# EAGLE board LilyPad_LED_5pcs_Panel_v10 (EAGLE 7.5.0), part 1 of 2
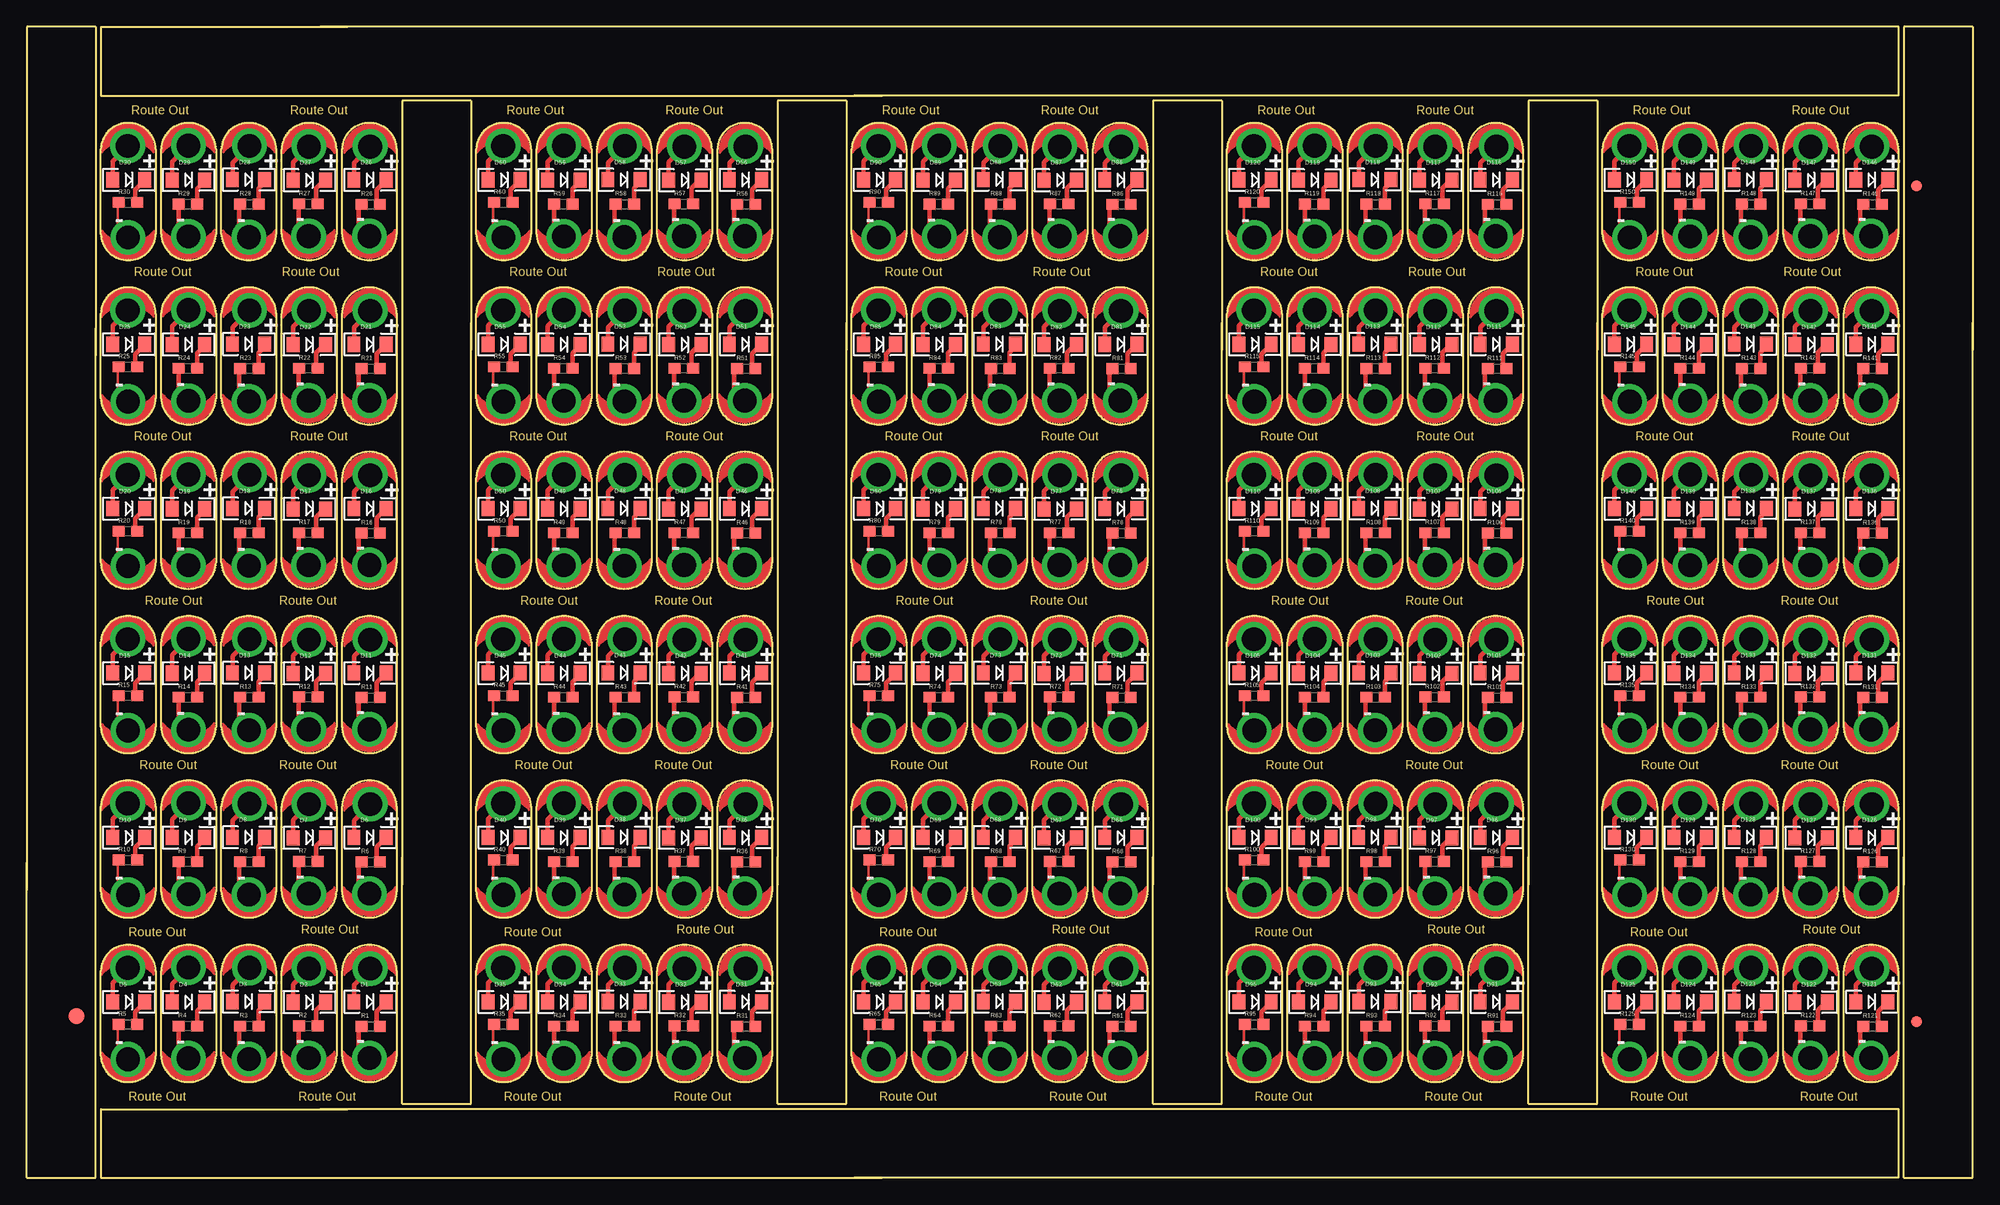
[diagram p0: board, top side]
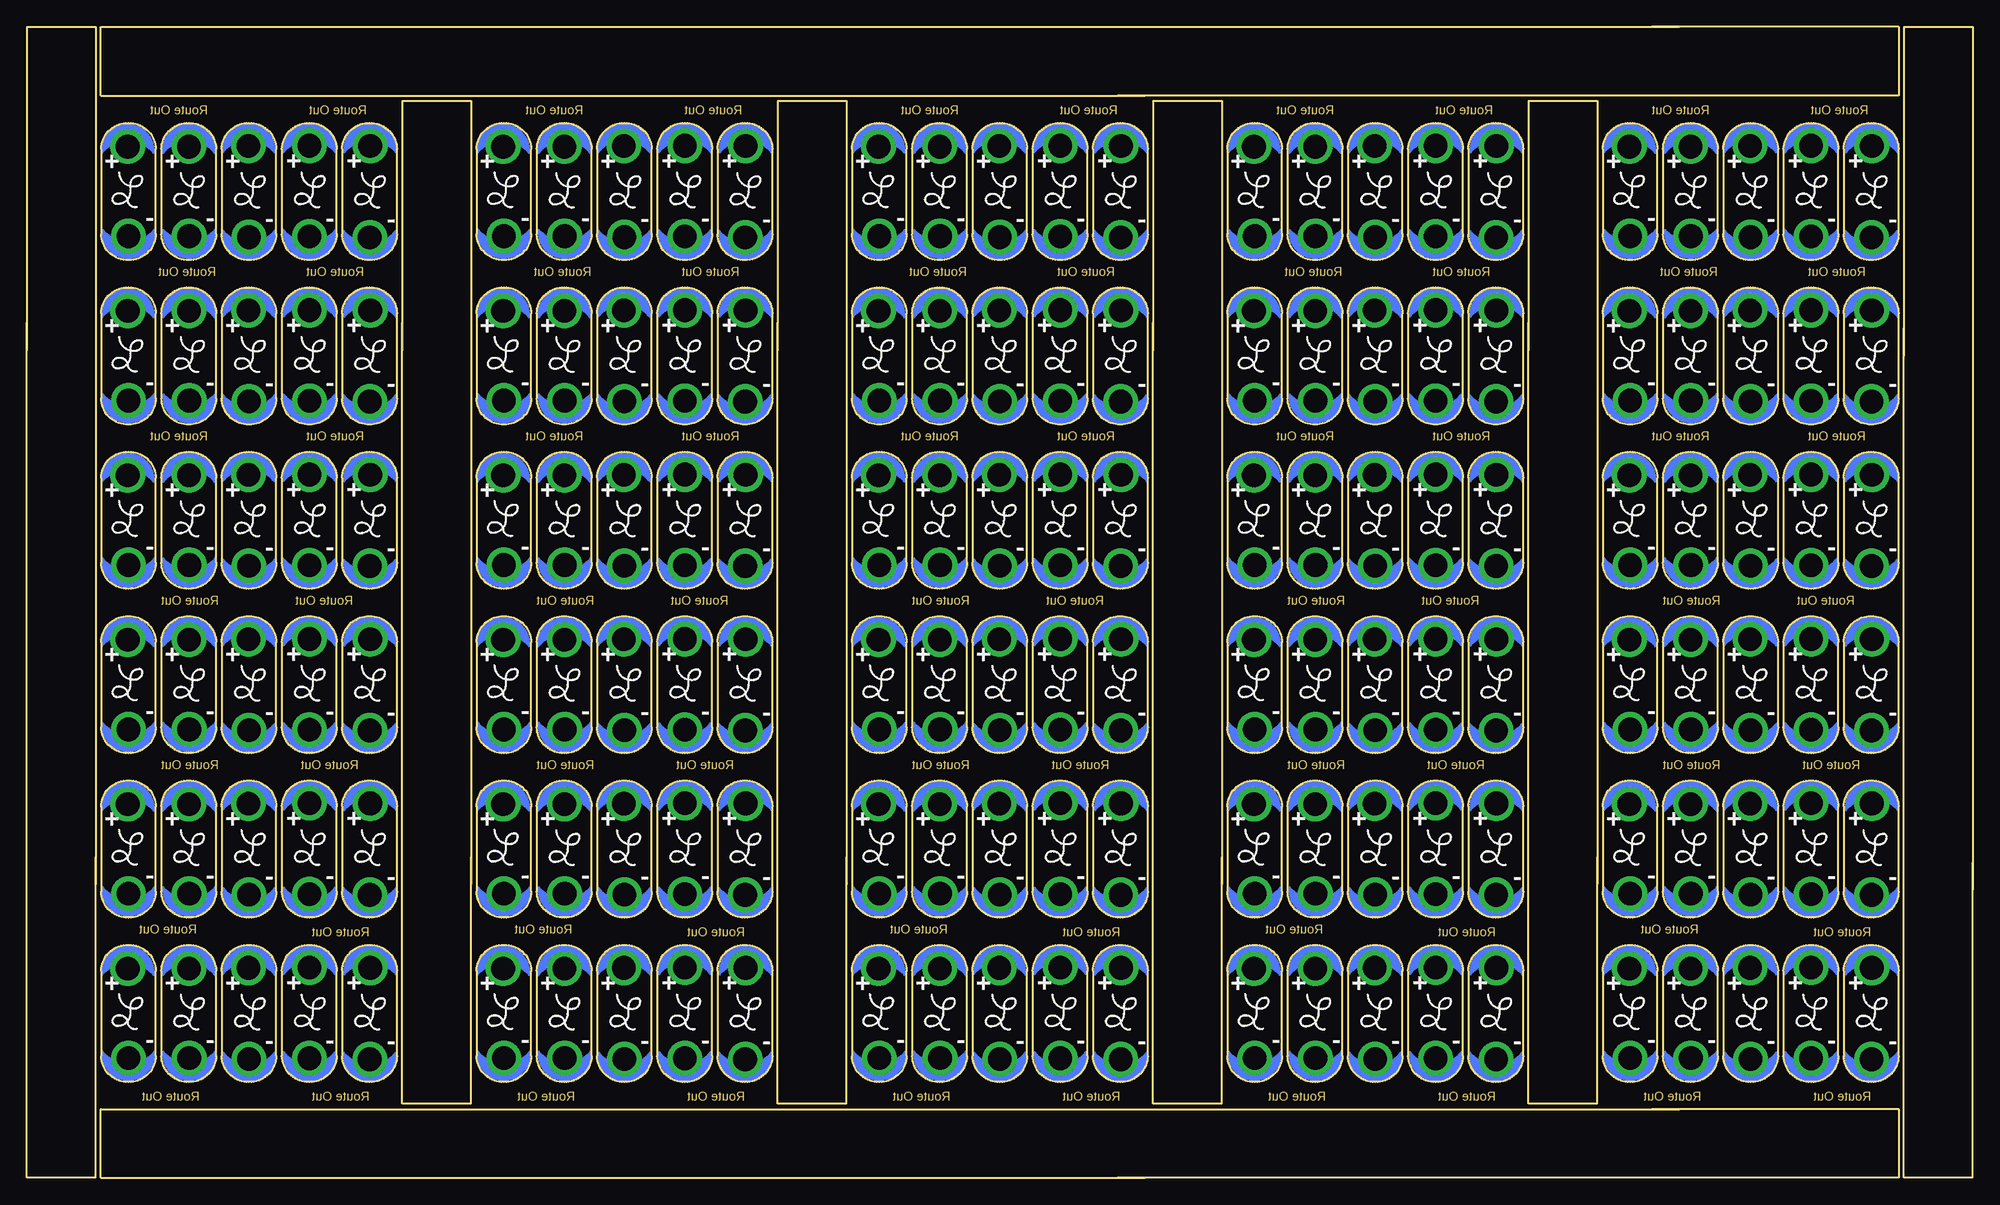
[diagram p1: board, bottom side, seen from below]

Size 180.34 x 106.68 mm. Coordinates in mm from the lower left corner, seen from the top.
Outline: 1098 segments
Copper layers (1*16): Top 0.035mm / dielectric 1.5mm / Bottom 0.035mm
Design rules "SparkFun-2-layer-STANDARD": minimum track width 10mil, minimum drill 20mil, track to track 10mil, track to pad 8mil, pad to pad 8mil, via to via 10mil, smd to smd 8mil, copper to edge 8mil, drill to drill 8mil, minimum pad ring 10mil, minimum via ring 10mil, stop-mask expansion 4mil, vias tented up to drill 25mil, thermal gap 10mil

## Footprints (pad centres in the part's own frame; a part is rotated, then mirrored left to right if it is on the bottom)
LED-1206 = smd 1.2 x 1.4: A -1.5,0; C 1.5,0
FIDUCIAL-1.5X3 = smd 1.5 x 1.5: 1 0,0
FIDUCIAL-1X2 = smd 1 x 1: 1 0,0
PETAL-SMALL-2SIDE = drill 2.2: 1 0,0
0603-RES = smd 1.1 x 1: 1 -0.85,0; 2 0.85,0

## Placement (x,y rotation side)
D1  WHITE  [LED-1206]  31.81,16.3 0 top
D2  WHITE  [LED-1206]  26.18,16.28 0 top
D3  WHITE  [LED-1206]  20.55,16.32 0 top
D4  WHITE  [LED-1206]  14.97,16.29 0 top
D5  WHITE  [LED-1206]  9.43,16.3 0 top
D6  WHITE  [LED-1206]  31.81,31.54 0 top
D7  WHITE  [LED-1206]  26.18,31.52 0 top
D8  WHITE  [LED-1206]  20.55,31.56 0 top
D9  WHITE  [LED-1206]  14.97,31.53 0 top
D10  WHITE  [LED-1206]  9.43,31.54 0 top
D11  WHITE  [LED-1206]  31.81,46.78 0 top
D12  WHITE  [LED-1206]  26.18,46.76 0 top
D13  WHITE  [LED-1206]  20.55,46.8 0 top
D14  WHITE  [LED-1206]  14.97,46.77 0 top
D15  WHITE  [LED-1206]  9.43,46.78 0 top
D16  WHITE  [LED-1206]  31.81,62.02 0 top
D17  WHITE  [LED-1206]  26.18,62 0 top
D18  WHITE  [LED-1206]  20.55,62.04 0 top
D19  WHITE  [LED-1206]  14.97,62.01 0 top
D20  WHITE  [LED-1206]  9.43,62.02 0 top
D21  WHITE  [LED-1206]  31.81,77.26 0 top
D22  WHITE  [LED-1206]  26.18,77.24 0 top
D23  WHITE  [LED-1206]  20.55,77.28 0 top
D24  WHITE  [LED-1206]  14.97,77.25 0 top
D25  WHITE  [LED-1206]  9.43,77.26 0 top
D26  WHITE  [LED-1206]  31.81,92.5 0 top
D27  WHITE  [LED-1206]  26.18,92.48 0 top
D28  WHITE  [LED-1206]  20.55,92.52 0 top
D29  WHITE  [LED-1206]  14.97,92.49 0 top
D30  WHITE  [LED-1206]  9.43,92.5 0 top
D31  WHITE  [LED-1206]  66.6,16.3 0 top
D32  WHITE  [LED-1206]  60.98,16.28 0 top
D33  WHITE  [LED-1206]  55.34,16.32 0 top
D34  WHITE  [LED-1206]  49.77,16.29 0 top
D35  WHITE  [LED-1206]  44.23,16.3 0 top
D36  WHITE  [LED-1206]  66.6,31.54 0 top
D37  WHITE  [LED-1206]  60.98,31.52 0 top
D38  WHITE  [LED-1206]  55.34,31.56 0 top
D39  WHITE  [LED-1206]  49.77,31.53 0 top
D40  WHITE  [LED-1206]  44.23,31.54 0 top
D41  WHITE  [LED-1206]  66.6,46.78 0 top
D42  WHITE  [LED-1206]  60.98,46.76 0 top
D43  WHITE  [LED-1206]  55.34,46.8 0 top
D44  WHITE  [LED-1206]  49.77,46.77 0 top
D45  WHITE  [LED-1206]  44.23,46.78 0 top
D46  WHITE  [LED-1206]  66.6,62.02 0 top
D47  WHITE  [LED-1206]  60.98,62 0 top
D48  WHITE  [LED-1206]  55.34,62.04 0 top
D49  WHITE  [LED-1206]  49.77,62.01 0 top
D50  WHITE  [LED-1206]  44.23,62.02 0 top
D51  WHITE  [LED-1206]  66.6,77.26 0 top
D52  WHITE  [LED-1206]  60.98,77.24 0 top
D53  WHITE  [LED-1206]  55.34,77.28 0 top
D54  WHITE  [LED-1206]  49.77,77.25 0 top
D55  WHITE  [LED-1206]  44.23,77.26 0 top
D56  WHITE  [LED-1206]  66.6,92.5 0 top
D57  WHITE  [LED-1206]  60.98,92.48 0 top
D58  WHITE  [LED-1206]  55.34,92.52 0 top
D59  WHITE  [LED-1206]  49.77,92.49 0 top
D60  WHITE  [LED-1206]  44.23,92.5 0 top
D61  WHITE  [LED-1206]  101.4,16.3 0 top
D62  WHITE  [LED-1206]  95.78,16.28 0 top
D63  WHITE  [LED-1206]  90.14,16.32 0 top
D64  WHITE  [LED-1206]  84.57,16.29 0 top
D65  WHITE  [LED-1206]  79.03,16.3 0 top
D66  WHITE  [LED-1206]  101.4,31.54 0 top
D67  WHITE  [LED-1206]  95.78,31.52 0 top
D68  WHITE  [LED-1206]  90.14,31.56 0 top
D69  WHITE  [LED-1206]  84.57,31.53 0 top
D70  WHITE  [LED-1206]  79.03,31.54 0 top
D71  WHITE  [LED-1206]  101.4,46.78 0 top
D72  WHITE  [LED-1206]  95.78,46.76 0 top
D73  WHITE  [LED-1206]  90.14,46.8 0 top
D74  WHITE  [LED-1206]  84.57,46.77 0 top
D75  WHITE  [LED-1206]  79.03,46.78 0 top
D76  WHITE  [LED-1206]  101.4,62.02 0 top
D77  WHITE  [LED-1206]  95.78,62 0 top
D78  WHITE  [LED-1206]  90.14,62.04 0 top
D79  WHITE  [LED-1206]  84.57,62.01 0 top
D80  WHITE  [LED-1206]  79.03,62.02 0 top
D81  WHITE  [LED-1206]  101.4,77.26 0 top
D82  WHITE  [LED-1206]  95.78,77.24 0 top
D83  WHITE  [LED-1206]  90.14,77.28 0 top
D84  WHITE  [LED-1206]  84.57,77.25 0 top
D85  WHITE  [LED-1206]  79.03,77.26 0 top
D86  WHITE  [LED-1206]  101.4,92.5 0 top
D87  WHITE  [LED-1206]  95.78,92.48 0 top
D88  WHITE  [LED-1206]  90.14,92.52 0 top
D89  WHITE  [LED-1206]  84.57,92.49 0 top
D90  WHITE  [LED-1206]  79.03,92.5 0 top
D91  WHITE  [LED-1206]  136.2,16.3 0 top
D92  WHITE  [LED-1206]  130.57,16.28 0 top
D93  WHITE  [LED-1206]  124.94,16.32 0 top
D94  WHITE  [LED-1206]  119.37,16.29 0 top
D95  WHITE  [LED-1206]  113.83,16.3 0 top
D96  WHITE  [LED-1206]  136.2,31.54 0 top
D97  WHITE  [LED-1206]  130.57,31.52 0 top
D98  WHITE  [LED-1206]  124.94,31.56 0 top
D99  WHITE  [LED-1206]  119.37,31.53 0 top
D100  WHITE  [LED-1206]  113.83,31.54 0 top
D101  WHITE  [LED-1206]  136.2,46.78 0 top
D102  WHITE  [LED-1206]  130.57,46.76 0 top
D103  WHITE  [LED-1206]  124.94,46.8 0 top
D104  WHITE  [LED-1206]  119.37,46.77 0 top
D105  WHITE  [LED-1206]  113.83,46.78 0 top
D106  WHITE  [LED-1206]  136.2,62.02 0 top
D107  WHITE  [LED-1206]  130.57,62 0 top
D108  WHITE  [LED-1206]  124.94,62.04 0 top
D109  WHITE  [LED-1206]  119.37,62.01 0 top
D110  WHITE  [LED-1206]  113.83,62.02 0 top
D111  WHITE  [LED-1206]  136.2,77.26 0 top
D112  WHITE  [LED-1206]  130.57,77.24 0 top
D113  WHITE  [LED-1206]  124.94,77.28 0 top
D114  WHITE  [LED-1206]  119.37,77.25 0 top
D115  WHITE  [LED-1206]  113.83,77.26 0 top
D116  WHITE  [LED-1206]  136.2,92.5 0 top
D117  WHITE  [LED-1206]  130.57,92.48 0 top
D118  WHITE  [LED-1206]  124.94,92.52 0 top
D119  WHITE  [LED-1206]  119.37,92.49 0 top
D120  WHITE  [LED-1206]  113.83,92.5 0 top
D121  WHITE  [LED-1206]  171,16.3 0 top
D122  WHITE  [LED-1206]  165.37,16.28 0 top
D123  WHITE  [LED-1206]  159.74,16.32 0 top
D124  WHITE  [LED-1206]  154.17,16.29 0 top
D125  WHITE  [LED-1206]  148.63,16.3 0 top
D126  WHITE  [LED-1206]  171,31.54 0 top
D127  WHITE  [LED-1206]  165.37,31.52 0 top
D128  WHITE  [LED-1206]  159.74,31.56 0 top
D129  WHITE  [LED-1206]  154.17,31.53 0 top
D130  WHITE  [LED-1206]  148.63,31.54 0 top
D131  WHITE  [LED-1206]  171,46.78 0 top
D132  WHITE  [LED-1206]  165.37,46.76 0 top
D133  WHITE  [LED-1206]  159.74,46.8 0 top
D134  WHITE  [LED-1206]  154.17,46.77 0 top
D135  WHITE  [LED-1206]  148.63,46.78 0 top
D136  WHITE  [LED-1206]  171,62.02 0 top
D137  WHITE  [LED-1206]  165.37,62 0 top
D138  WHITE  [LED-1206]  159.74,62.04 0 top
D139  WHITE  [LED-1206]  154.17,62.01 0 top
D140  WHITE  [LED-1206]  148.63,62.02 0 top
D141  WHITE  [LED-1206]  171,77.26 0 top
D142  WHITE  [LED-1206]  165.37,77.24 0 top
D143  WHITE  [LED-1206]  159.74,77.28 0 top
D144  WHITE  [LED-1206]  154.17,77.25 0 top
D145  WHITE  [LED-1206]  148.63,77.26 0 top
D146  WHITE  [LED-1206]  171,92.5 0 top
D147  WHITE  [LED-1206]  165.37,92.48 0 top
D148  WHITE  [LED-1206]  159.74,92.52 0 top
D149  WHITE  [LED-1206]  154.17,92.49 0 top
D150  WHITE  [LED-1206]  148.63,92.5 0 top
E$1  [FIDUCIAL-1.5X3]  4.57,14.99 0 top
E$15  [FIDUCIAL-1X2]  175.13,14.48 0 top
E$16  [FIDUCIAL-1X2]  175.13,91.95 180 top
LED+1  SEWTAP6  [PETAL-SMALL-2SIDE]  31.81,19.39 180 top
LED+2  SEWTAP6  [PETAL-SMALL-2SIDE]  26.14,19.39 180 top
LED+3  SEWTAP6  [PETAL-SMALL-2SIDE]  20.61,19.44 180 top
LED+4  SEWTAP6  [PETAL-SMALL-2SIDE]  14.97,19.47 180 top
LED+5  SEWTAP6  [PETAL-SMALL-2SIDE]  9.34,19.45 180 top
LED+6  SEWTAP6  [PETAL-SMALL-2SIDE]  31.81,34.63 180 top
LED+7  SEWTAP6  [PETAL-SMALL-2SIDE]  26.14,34.63 180 top
LED+8  SEWTAP6  [PETAL-SMALL-2SIDE]  20.61,34.68 180 top
LED+9  SEWTAP6  [PETAL-SMALL-2SIDE]  14.97,34.71 180 top
LED+10  SEWTAP6  [PETAL-SMALL-2SIDE]  9.34,34.69 180 top
LED+11  SEWTAP6  [PETAL-SMALL-2SIDE]  31.81,49.87 180 top
LED+12  SEWTAP6  [PETAL-SMALL-2SIDE]  26.14,49.87 180 top
LED+13  SEWTAP6  [PETAL-SMALL-2SIDE]  20.61,49.92 180 top
LED+14  SEWTAP6  [PETAL-SMALL-2SIDE]  14.97,49.95 180 top
LED+15  SEWTAP6  [PETAL-SMALL-2SIDE]  9.34,49.93 180 top
LED+16  SEWTAP6  [PETAL-SMALL-2SIDE]  31.81,65.11 180 top
LED+17  SEWTAP6  [PETAL-SMALL-2SIDE]  26.14,65.11 180 top
LED+18  SEWTAP6  [PETAL-SMALL-2SIDE]  20.61,65.16 180 top
LED+19  SEWTAP6  [PETAL-SMALL-2SIDE]  14.97,65.19 180 top
LED+20  SEWTAP6  [PETAL-SMALL-2SIDE]  9.34,65.17 180 top
LED+21  SEWTAP6  [PETAL-SMALL-2SIDE]  31.81,80.35 180 top
LED+22  SEWTAP6  [PETAL-SMALL-2SIDE]  26.14,80.35 180 top
LED+23  SEWTAP6  [PETAL-SMALL-2SIDE]  20.61,80.4 180 top
LED+24  SEWTAP6  [PETAL-SMALL-2SIDE]  14.97,80.43 180 top
LED+25  SEWTAP6  [PETAL-SMALL-2SIDE]  9.34,80.41 180 top
LED+26  SEWTAP6  [PETAL-SMALL-2SIDE]  31.81,95.59 180 top
LED+27  SEWTAP6  [PETAL-SMALL-2SIDE]  26.14,95.59 180 top
LED+28  SEWTAP6  [PETAL-SMALL-2SIDE]  20.61,95.64 180 top
LED+29  SEWTAP6  [PETAL-SMALL-2SIDE]  14.97,95.67 180 top
LED+30  SEWTAP6  [PETAL-SMALL-2SIDE]  9.34,95.65 180 top
LED+31  SEWTAP6  [PETAL-SMALL-2SIDE]  66.61,19.39 180 top
LED+32  SEWTAP6  [PETAL-SMALL-2SIDE]  60.93,19.39 180 top
LED+33  SEWTAP6  [PETAL-SMALL-2SIDE]  55.41,19.44 180 top
LED+34  SEWTAP6  [PETAL-SMALL-2SIDE]  49.76,19.47 180 top
LED+35  SEWTAP6  [PETAL-SMALL-2SIDE]  44.14,19.45 180 top
LED+36  SEWTAP6  [PETAL-SMALL-2SIDE]  66.61,34.63 180 top
LED+37  SEWTAP6  [PETAL-SMALL-2SIDE]  60.93,34.63 180 top
LED+38  SEWTAP6  [PETAL-SMALL-2SIDE]  55.41,34.68 180 top
LED+39  SEWTAP6  [PETAL-SMALL-2SIDE]  49.76,34.71 180 top
LED+40  SEWTAP6  [PETAL-SMALL-2SIDE]  44.14,34.69 180 top
LED+41  SEWTAP6  [PETAL-SMALL-2SIDE]  66.61,49.87 180 top
LED+42  SEWTAP6  [PETAL-SMALL-2SIDE]  60.93,49.87 180 top
LED+43  SEWTAP6  [PETAL-SMALL-2SIDE]  55.41,49.92 180 top
LED+44  SEWTAP6  [PETAL-SMALL-2SIDE]  49.76,49.95 180 top
LED+45  SEWTAP6  [PETAL-SMALL-2SIDE]  44.14,49.93 180 top
LED+46  SEWTAP6  [PETAL-SMALL-2SIDE]  66.61,65.11 180 top
LED+47  SEWTAP6  [PETAL-SMALL-2SIDE]  60.93,65.11 180 top
LED+48  SEWTAP6  [PETAL-SMALL-2SIDE]  55.41,65.16 180 top
LED+49  SEWTAP6  [PETAL-SMALL-2SIDE]  49.76,65.19 180 top
LED+50  SEWTAP6  [PETAL-SMALL-2SIDE]  44.14,65.17 180 top
LED+51  SEWTAP6  [PETAL-SMALL-2SIDE]  66.61,80.35 180 top
LED+52  SEWTAP6  [PETAL-SMALL-2SIDE]  60.93,80.35 180 top
LED+53  SEWTAP6  [PETAL-SMALL-2SIDE]  55.41,80.4 180 top
LED+54  SEWTAP6  [PETAL-SMALL-2SIDE]  49.76,80.43 180 top
LED+55  SEWTAP6  [PETAL-SMALL-2SIDE]  44.14,80.41 180 top
LED+56  SEWTAP6  [PETAL-SMALL-2SIDE]  66.61,95.59 180 top
LED+57  SEWTAP6  [PETAL-SMALL-2SIDE]  60.93,95.59 180 top
LED+58  SEWTAP6  [PETAL-SMALL-2SIDE]  55.41,95.64 180 top
LED+59  SEWTAP6  [PETAL-SMALL-2SIDE]  49.76,95.67 180 top
LED+60  SEWTAP6  [PETAL-SMALL-2SIDE]  44.14,95.65 180 top
LED+61  SEWTAP6  [PETAL-SMALL-2SIDE]  101.41,19.39 180 top
LED+62  SEWTAP6  [PETAL-SMALL-2SIDE]  95.73,19.39 180 top
LED+63  SEWTAP6  [PETAL-SMALL-2SIDE]  90.21,19.44 180 top
LED+64  SEWTAP6  [PETAL-SMALL-2SIDE]  84.56,19.47 180 top
LED+65  SEWTAP6  [PETAL-SMALL-2SIDE]  78.94,19.45 180 top
LED+66  SEWTAP6  [PETAL-SMALL-2SIDE]  101.41,34.63 180 top
LED+67  SEWTAP6  [PETAL-SMALL-2SIDE]  95.73,34.63 180 top
LED+68  SEWTAP6  [PETAL-SMALL-2SIDE]  90.21,34.68 180 top
LED+69  SEWTAP6  [PETAL-SMALL-2SIDE]  84.56,34.71 180 top
LED+70  SEWTAP6  [PETAL-SMALL-2SIDE]  78.94,34.69 180 top
LED+71  SEWTAP6  [PETAL-SMALL-2SIDE]  101.41,49.87 180 top
LED+72  SEWTAP6  [PETAL-SMALL-2SIDE]  95.73,49.87 180 top
LED+73  SEWTAP6  [PETAL-SMALL-2SIDE]  90.21,49.92 180 top
LED+74  SEWTAP6  [PETAL-SMALL-2SIDE]  84.56,49.95 180 top
LED+75  SEWTAP6  [PETAL-SMALL-2SIDE]  78.94,49.93 180 top
LED+76  SEWTAP6  [PETAL-SMALL-2SIDE]  101.41,65.11 180 top
LED+77  SEWTAP6  [PETAL-SMALL-2SIDE]  95.73,65.11 180 top
LED+78  SEWTAP6  [PETAL-SMALL-2SIDE]  90.21,65.16 180 top
LED+79  SEWTAP6  [PETAL-SMALL-2SIDE]  84.56,65.19 180 top
LED+80  SEWTAP6  [PETAL-SMALL-2SIDE]  78.94,65.17 180 top
LED+81  SEWTAP6  [PETAL-SMALL-2SIDE]  101.41,80.35 180 top
LED+82  SEWTAP6  [PETAL-SMALL-2SIDE]  95.73,80.35 180 top
LED+83  SEWTAP6  [PETAL-SMALL-2SIDE]  90.21,80.4 180 top
LED+84  SEWTAP6  [PETAL-SMALL-2SIDE]  84.56,80.43 180 top
LED+85  SEWTAP6  [PETAL-SMALL-2SIDE]  78.94,80.41 180 top
LED+86  SEWTAP6  [PETAL-SMALL-2SIDE]  101.41,95.59 180 top
LED+87  SEWTAP6  [PETAL-SMALL-2SIDE]  95.73,95.59 180 top
LED+88  SEWTAP6  [PETAL-SMALL-2SIDE]  90.21,95.64 180 top
LED+89  SEWTAP6  [PETAL-SMALL-2SIDE]  84.56,95.67 180 top
LED+90  SEWTAP6  [PETAL-SMALL-2SIDE]  78.94,95.65 180 top
LED+91  SEWTAP6  [PETAL-SMALL-2SIDE]  136.21,19.39 180 top
LED+92  SEWTAP6  [PETAL-SMALL-2SIDE]  130.53,19.39 180 top
LED+93  SEWTAP6  [PETAL-SMALL-2SIDE]  125,19.44 180 top
LED+94  SEWTAP6  [PETAL-SMALL-2SIDE]  119.36,19.47 180 top
LED+95  SEWTAP6  [PETAL-SMALL-2SIDE]  113.73,19.45 180 top
LED+96  SEWTAP6  [PETAL-SMALL-2SIDE]  136.21,34.63 180 top
LED+97  SEWTAP6  [PETAL-SMALL-2SIDE]  130.53,34.63 180 top
LED+98  SEWTAP6  [PETAL-SMALL-2SIDE]  125,34.68 180 top
LED+99  SEWTAP6  [PETAL-SMALL-2SIDE]  119.36,34.71 180 top
LED+100  SEWTAP6  [PETAL-SMALL-2SIDE]  113.73,34.69 180 top
LED+101  SEWTAP6  [PETAL-SMALL-2SIDE]  136.21,49.87 180 top
LED+102  SEWTAP6  [PETAL-SMALL-2SIDE]  130.53,49.87 180 top
LED+103  SEWTAP6  [PETAL-SMALL-2SIDE]  125,49.92 180 top
LED+104  SEWTAP6  [PETAL-SMALL-2SIDE]  119.36,49.95 180 top
LED+105  SEWTAP6  [PETAL-SMALL-2SIDE]  113.73,49.93 180 top
LED+106  SEWTAP6  [PETAL-SMALL-2SIDE]  136.21,65.11 180 top
LED+107  SEWTAP6  [PETAL-SMALL-2SIDE]  130.53,65.11 180 top
LED+108  SEWTAP6  [PETAL-SMALL-2SIDE]  125,65.16 180 top
LED+109  SEWTAP6  [PETAL-SMALL-2SIDE]  119.36,65.19 180 top
LED+110  SEWTAP6  [PETAL-SMALL-2SIDE]  113.73,65.17 180 top
LED+111  SEWTAP6  [PETAL-SMALL-2SIDE]  136.21,80.35 180 top
LED+112  SEWTAP6  [PETAL-SMALL-2SIDE]  130.53,80.35 180 top
LED+113  SEWTAP6  [PETAL-SMALL-2SIDE]  125,80.4 180 top
LED+114  SEWTAP6  [PETAL-SMALL-2SIDE]  119.36,80.43 180 top
LED+115  SEWTAP6  [PETAL-SMALL-2SIDE]  113.73,80.41 180 top
LED+116  SEWTAP6  [PETAL-SMALL-2SIDE]  136.21,95.59 180 top
LED+117  SEWTAP6  [PETAL-SMALL-2SIDE]  130.53,95.59 180 top
LED+118  SEWTAP6  [PETAL-SMALL-2SIDE]  125,95.64 180 top
LED+119  SEWTAP6  [PETAL-SMALL-2SIDE]  119.36,95.67 180 top
LED+120  SEWTAP6  [PETAL-SMALL-2SIDE]  113.73,95.65 180 top
LED+121  SEWTAP6  [PETAL-SMALL-2SIDE]  171.01,19.39 180 top
LED+122  SEWTAP6  [PETAL-SMALL-2SIDE]  165.33,19.39 180 top
LED+123  SEWTAP6  [PETAL-SMALL-2SIDE]  159.8,19.44 180 top
LED+124  SEWTAP6  [PETAL-SMALL-2SIDE]  154.16,19.47 180 top
LED+125  SEWTAP6  [PETAL-SMALL-2SIDE]  148.53,19.45 180 top
LED+126  SEWTAP6  [PETAL-SMALL-2SIDE]  171.01,34.63 180 top
LED+127  SEWTAP6  [PETAL-SMALL-2SIDE]  165.33,34.63 180 top
LED+128  SEWTAP6  [PETAL-SMALL-2SIDE]  159.8,34.68 180 top
LED+129  SEWTAP6  [PETAL-SMALL-2SIDE]  154.16,34.71 180 top
LED+130  SEWTAP6  [PETAL-SMALL-2SIDE]  148.53,34.69 180 top
LED+131  SEWTAP6  [PETAL-SMALL-2SIDE]  171.01,49.87 180 top
LED+132  SEWTAP6  [PETAL-SMALL-2SIDE]  165.33,49.87 180 top
LED+133  SEWTAP6  [PETAL-SMALL-2SIDE]  159.8,49.92 180 top
LED+134  SEWTAP6  [PETAL-SMALL-2SIDE]  154.16,49.95 180 top
LED+135  SEWTAP6  [PETAL-SMALL-2SIDE]  148.53,49.93 180 top
LED+136  SEWTAP6  [PETAL-SMALL-2SIDE]  171.01,65.11 180 top
LED+137  SEWTAP6  [PETAL-SMALL-2SIDE]  165.33,65.11 180 top
LED+138  SEWTAP6  [PETAL-SMALL-2SIDE]  159.8,65.16 180 top
LED+139  SEWTAP6  [PETAL-SMALL-2SIDE]  154.16,65.19 180 top
LED+140  SEWTAP6  [PETAL-SMALL-2SIDE]  148.53,65.17 180 top
LED+141  SEWTAP6  [PETAL-SMALL-2SIDE]  171.01,80.35 180 top
LED+142  SEWTAP6  [PETAL-SMALL-2SIDE]  165.33,80.35 180 top
LED+143  SEWTAP6  [PETAL-SMALL-2SIDE]  159.8,80.4 180 top
LED+144  SEWTAP6  [PETAL-SMALL-2SIDE]  154.16,80.43 180 top
LED+145  SEWTAP6  [PETAL-SMALL-2SIDE]  148.53,80.41 180 top
LED+146  SEWTAP6  [PETAL-SMALL-2SIDE]  171.01,95.59 180 top
LED+147  SEWTAP6  [PETAL-SMALL-2SIDE]  165.33,95.59 180 top
LED+148  SEWTAP6  [PETAL-SMALL-2SIDE]  159.8,95.64 180 top
LED+149  SEWTAP6  [PETAL-SMALL-2SIDE]  154.16,95.67 180 top
LED+150  SEWTAP6  [PETAL-SMALL-2SIDE]  148.53,95.65 180 top
LED-1  SEWTAP6  [PETAL-SMALL-2SIDE]  31.74,11.08 0 top
LED-2  SEWTAP6  [PETAL-SMALL-2SIDE]  26.11,11.08 0 top
LED-3  SEWTAP6  [PETAL-SMALL-2SIDE]  20.58,11 0 top
LED-4  SEWTAP6  [PETAL-SMALL-2SIDE]  14.96,11.06 0 top
LED-5  SEWTAP6  [PETAL-SMALL-2SIDE]  9.37,10.98 0 top
LED-6  SEWTAP6  [PETAL-SMALL-2SIDE]  31.74,26.32 0 top
LED-7  SEWTAP6  [PETAL-SMALL-2SIDE]  26.11,26.32 0 top
LED-8  SEWTAP6  [PETAL-SMALL-2SIDE]  20.58,26.24 0 top
LED-9  SEWTAP6  [PETAL-SMALL-2SIDE]  14.96,26.3 0 top
LED-10  SEWTAP6  [PETAL-SMALL-2SIDE]  9.37,26.22 0 top
LED-11  SEWTAP6  [PETAL-SMALL-2SIDE]  31.74,41.56 0 top
LED-12  SEWTAP6  [PETAL-SMALL-2SIDE]  26.11,41.56 0 top
LED-13  SEWTAP6  [PETAL-SMALL-2SIDE]  20.58,41.48 0 top
LED-14  SEWTAP6  [PETAL-SMALL-2SIDE]  14.96,41.54 0 top
LED-15  SEWTAP6  [PETAL-SMALL-2SIDE]  9.37,41.46 0 top
LED-16  SEWTAP6  [PETAL-SMALL-2SIDE]  31.74,56.8 0 top
LED-17  SEWTAP6  [PETAL-SMALL-2SIDE]  26.11,56.8 0 top
LED-18  SEWTAP6  [PETAL-SMALL-2SIDE]  20.58,56.72 0 top
LED-19  SEWTAP6  [PETAL-SMALL-2SIDE]  14.96,56.78 0 top
LED-20  SEWTAP6  [PETAL-SMALL-2SIDE]  9.37,56.7 0 top
LED-21  SEWTAP6  [PETAL-SMALL-2SIDE]  31.74,72.04 0 top
LED-22  SEWTAP6  [PETAL-SMALL-2SIDE]  26.11,72.04 0 top
LED-23  SEWTAP6  [PETAL-SMALL-2SIDE]  20.58,71.96 0 top
LED-24  SEWTAP6  [PETAL-SMALL-2SIDE]  14.96,72.02 0 top
LED-25  SEWTAP6  [PETAL-SMALL-2SIDE]  9.37,71.94 0 top
LED-26  SEWTAP6  [PETAL-SMALL-2SIDE]  31.74,87.28 0 top
LED-27  SEWTAP6  [PETAL-SMALL-2SIDE]  26.11,87.28 0 top
LED-28  SEWTAP6  [PETAL-SMALL-2SIDE]  20.58,87.2 0 top
LED-29  SEWTAP6  [PETAL-SMALL-2SIDE]  14.96,87.26 0 top
LED-30  SEWTAP6  [PETAL-SMALL-2SIDE]  9.37,87.18 0 top
LED-31  SEWTAP6  [PETAL-SMALL-2SIDE]  66.54,11.08 0 top
LED-32  SEWTAP6  [PETAL-SMALL-2SIDE]  60.91,11.08 0 top
LED-33  SEWTAP6  [PETAL-SMALL-2SIDE]  55.38,11 0 top
LED-34  SEWTAP6  [PETAL-SMALL-2SIDE]  49.76,11.06 0 top
LED-35  SEWTAP6  [PETAL-SMALL-2SIDE]  44.17,10.98 0 top
LED-36  SEWTAP6  [PETAL-SMALL-2SIDE]  66.54,26.32 0 top
LED-37  SEWTAP6  [PETAL-SMALL-2SIDE]  60.91,26.32 0 top
LED-38  SEWTAP6  [PETAL-SMALL-2SIDE]  55.38,26.24 0 top
LED-39  SEWTAP6  [PETAL-SMALL-2SIDE]  49.76,26.3 0 top
LED-40  SEWTAP6  [PETAL-SMALL-2SIDE]  44.17,26.22 0 top
LED-41  SEWTAP6  [PETAL-SMALL-2SIDE]  66.54,41.56 0 top
LED-42  SEWTAP6  [PETAL-SMALL-2SIDE]  60.91,41.56 0 top
LED-43  SEWTAP6  [PETAL-SMALL-2SIDE]  55.38,41.48 0 top
LED-44  SEWTAP6  [PETAL-SMALL-2SIDE]  49.76,41.54 0 top
LED-45  SEWTAP6  [PETAL-SMALL-2SIDE]  44.17,41.46 0 top
LED-46  SEWTAP6  [PETAL-SMALL-2SIDE]  66.54,56.8 0 top
LED-47  SEWTAP6  [PETAL-SMALL-2SIDE]  60.91,56.8 0 top
LED-48  SEWTAP6  [PETAL-SMALL-2SIDE]  55.38,56.72 0 top
LED-49  SEWTAP6  [PETAL-SMALL-2SIDE]  49.76,56.78 0 top
LED-50  SEWTAP6  [PETAL-SMALL-2SIDE]  44.17,56.7 0 top
LED-51  SEWTAP6  [PETAL-SMALL-2SIDE]  66.54,72.04 0 top
LED-52  SEWTAP6  [PETAL-SMALL-2SIDE]  60.91,72.04 0 top
LED-53  SEWTAP6  [PETAL-SMALL-2SIDE]  55.38,71.96 0 top
LED-54  SEWTAP6  [PETAL-SMALL-2SIDE]  49.76,72.02 0 top
LED-55  SEWTAP6  [PETAL-SMALL-2SIDE]  44.17,71.94 0 top
LED-56  SEWTAP6  [PETAL-SMALL-2SIDE]  66.54,87.28 0 top
LED-57  SEWTAP6  [PETAL-SMALL-2SIDE]  60.91,87.28 0 top
LED-58  SEWTAP6  [PETAL-SMALL-2SIDE]  55.38,87.2 0 top
LED-59  SEWTAP6  [PETAL-SMALL-2SIDE]  49.76,87.26 0 top
LED-60  SEWTAP6  [PETAL-SMALL-2SIDE]  44.17,87.18 0 top
LED-61  SEWTAP6  [PETAL-SMALL-2SIDE]  101.34,11.08 0 top
LED-62  SEWTAP6  [PETAL-SMALL-2SIDE]  95.71,11.08 0 top
LED-63  SEWTAP6  [PETAL-SMALL-2SIDE]  90.18,11 0 top
LED-64  SEWTAP6  [PETAL-SMALL-2SIDE]  84.55,11.06 0 top
LED-65  SEWTAP6  [PETAL-SMALL-2SIDE]  78.97,10.98 0 top
LED-66  SEWTAP6  [PETAL-SMALL-2SIDE]  101.34,26.32 0 top
LED-67  SEWTAP6  [PETAL-SMALL-2SIDE]  95.71,26.32 0 top
LED-68  SEWTAP6  [PETAL-SMALL-2SIDE]  90.18,26.24 0 top
LED-69  SEWTAP6  [PETAL-SMALL-2SIDE]  84.55,26.3 0 top
LED-70  SEWTAP6  [PETAL-SMALL-2SIDE]  78.97,26.22 0 top
LED-71  SEWTAP6  [PETAL-SMALL-2SIDE]  101.34,41.56 0 top
LED-72  SEWTAP6  [PETAL-SMALL-2SIDE]  95.71,41.56 0 top
LED-73  SEWTAP6  [PETAL-SMALL-2SIDE]  90.18,41.48 0 top
LED-74  SEWTAP6  [PETAL-SMALL-2SIDE]  84.55,41.54 0 top
LED-75  SEWTAP6  [PETAL-SMALL-2SIDE]  78.97,41.46 0 top
LED-76  SEWTAP6  [PETAL-SMALL-2SIDE]  101.34,56.8 0 top
LED-77  SEWTAP6  [PETAL-SMALL-2SIDE]  95.71,56.8 0 top
LED-78  SEWTAP6  [PETAL-SMALL-2SIDE]  90.18,56.72 0 top
LED-79  SEWTAP6  [PETAL-SMALL-2SIDE]  84.55,56.78 0 top
LED-80  SEWTAP6  [PETAL-SMALL-2SIDE]  78.97,56.7 0 top
LED-81  SEWTAP6  [PETAL-SMALL-2SIDE]  101.34,72.04 0 top
LED-82  SEWTAP6  [PETAL-SMALL-2SIDE]  95.71,72.04 0 top
LED-83  SEWTAP6  [PETAL-SMALL-2SIDE]  90.18,71.96 0 top
LED-84  SEWTAP6  [PETAL-SMALL-2SIDE]  84.55,72.02 0 top
LED-85  SEWTAP6  [PETAL-SMALL-2SIDE]  78.97,71.94 0 top
LED-86  SEWTAP6  [PETAL-SMALL-2SIDE]  101.34,87.28 0 top
LED-87  SEWTAP6  [PETAL-SMALL-2SIDE]  95.71,87.28 0 top
LED-88  SEWTAP6  [PETAL-SMALL-2SIDE]  90.18,87.2 0 top
LED-89  SEWTAP6  [PETAL-SMALL-2SIDE]  84.55,87.26 0 top
LED-90  SEWTAP6  [PETAL-SMALL-2SIDE]  78.97,87.18 0 top
LED-91  SEWTAP6  [PETAL-SMALL-2SIDE]  136.14,11.08 0 top
LED-92  SEWTAP6  [PETAL-SMALL-2SIDE]  130.51,11.08 0 top
LED-93  SEWTAP6  [PETAL-SMALL-2SIDE]  124.98,11 0 top
LED-94  SEWTAP6  [PETAL-SMALL-2SIDE]  119.35,11.06 0 top
LED-95  SEWTAP6  [PETAL-SMALL-2SIDE]  113.77,10.98 0 top
LED-96  SEWTAP6  [PETAL-SMALL-2SIDE]  136.14,26.32 0 top
LED-97  SEWTAP6  [PETAL-SMALL-2SIDE]  130.51,26.32 0 top
LED-98  SEWTAP6  [PETAL-SMALL-2SIDE]  124.98,26.24 0 top
LED-99  SEWTAP6  [PETAL-SMALL-2SIDE]  119.35,26.3 0 top
LED-100  SEWTAP6  [PETAL-SMALL-2SIDE]  113.77,26.22 0 top
LED-101  SEWTAP6  [PETAL-SMALL-2SIDE]  136.14,41.56 0 top
LED-102  SEWTAP6  [PETAL-SMALL-2SIDE]  130.51,41.56 0 top
LED-103  SEWTAP6  [PETAL-SMALL-2SIDE]  124.98,41.48 0 top
LED-104  SEWTAP6  [PETAL-SMALL-2SIDE]  119.35,41.54 0 top
LED-105  SEWTAP6  [PETAL-SMALL-2SIDE]  113.77,41.46 0 top
LED-106  SEWTAP6  [PETAL-SMALL-2SIDE]  136.14,56.8 0 top
LED-107  SEWTAP6  [PETAL-SMALL-2SIDE]  130.51,56.8 0 top
LED-108  SEWTAP6  [PETAL-SMALL-2SIDE]  124.98,56.72 0 top
LED-109  SEWTAP6  [PETAL-SMALL-2SIDE]  119.35,56.78 0 top
LED-110  SEWTAP6  [PETAL-SMALL-2SIDE]  113.77,56.7 0 top
LED-111  SEWTAP6  [PETAL-SMALL-2SIDE]  136.14,72.04 0 top
LED-112  SEWTAP6  [PETAL-SMALL-2SIDE]  130.51,72.04 0 top
LED-113  SEWTAP6  [PETAL-SMALL-2SIDE]  124.98,71.96 0 top
LED-114  SEWTAP6  [PETAL-SMALL-2SIDE]  119.35,72.02 0 top
LED-115  SEWTAP6  [PETAL-SMALL-2SIDE]  113.77,71.94 0 top
LED-116  SEWTAP6  [PETAL-SMALL-2SIDE]  136.14,87.28 0 top
LED-117  SEWTAP6  [PETAL-SMALL-2SIDE]  130.51,87.28 0 top
LED-118  SEWTAP6  [PETAL-SMALL-2SIDE]  124.98,87.2 0 top
LED-119  SEWTAP6  [PETAL-SMALL-2SIDE]  119.35,87.26 0 top
LED-120  SEWTAP6  [PETAL-SMALL-2SIDE]  113.77,87.18 0 top
LED-121  SEWTAP6  [PETAL-SMALL-2SIDE]  170.94,11.08 0 top
LED-122  SEWTAP6  [PETAL-SMALL-2SIDE]  165.3,11.08 0 top
LED-123  SEWTAP6  [PETAL-SMALL-2SIDE]  159.77,11 0 top
LED-124  SEWTAP6  [PETAL-SMALL-2SIDE]  154.15,11.06 0 top
LED-125  SEWTAP6  [PETAL-SMALL-2SIDE]  148.56,10.98 0 top
LED-126  SEWTAP6  [PETAL-SMALL-2SIDE]  170.94,26.32 0 top
LED-127  SEWTAP6  [PETAL-SMALL-2SIDE]  165.3,26.32 0 top
LED-128  SEWTAP6  [PETAL-SMALL-2SIDE]  159.77,26.24 0 top
LED-129  SEWTAP6  [PETAL-SMALL-2SIDE]  154.15,26.3 0 top
LED-130  SEWTAP6  [PETAL-SMALL-2SIDE]  148.56,26.22 0 top
LED-131  SEWTAP6  [PETAL-SMALL-2SIDE]  170.94,41.56 0 top
LED-132  SEWTAP6  [PETAL-SMALL-2SIDE]  165.3,41.56 0 top
LED-133  SEWTAP6  [PETAL-SMALL-2SIDE]  159.77,41.48 0 top
LED-134  SEWTAP6  [PETAL-SMALL-2SIDE]  154.15,41.54 0 top
LED-135  SEWTAP6  [PETAL-SMALL-2SIDE]  148.56,41.46 0 top
LED-136  SEWTAP6  [PETAL-SMALL-2SIDE]  170.94,56.8 0 top
LED-137  SEWTAP6  [PETAL-SMALL-2SIDE]  165.3,56.8 0 top
LED-138  SEWTAP6  [PETAL-SMALL-2SIDE]  159.77,56.72 0 top
LED-139  SEWTAP6  [PETAL-SMALL-2SIDE]  154.15,56.78 0 top
LED-140  SEWTAP6  [PETAL-SMALL-2SIDE]  148.56,56.7 0 top
LED-141  SEWTAP6  [PETAL-SMALL-2SIDE]  170.94,72.04 0 top
LED-142  SEWTAP6  [PETAL-SMALL-2SIDE]  165.3,72.04 0 top
LED-143  SEWTAP6  [PETAL-SMALL-2SIDE]  159.77,71.96 0 top
LED-144  SEWTAP6  [PETAL-SMALL-2SIDE]  154.15,72.02 0 top
LED-145  SEWTAP6  [PETAL-SMALL-2SIDE]  148.56,71.94 0 top
LED-146  SEWTAP6  [PETAL-SMALL-2SIDE]  170.94,87.28 0 top
LED-147  SEWTAP6  [PETAL-SMALL-2SIDE]  165.3,87.28 0 top
LED-148  SEWTAP6  [PETAL-SMALL-2SIDE]  159.77,87.2 0 top
LED-149  SEWTAP6  [PETAL-SMALL-2SIDE]  154.15,87.26 0 top
LED-150  SEWTAP6  [PETAL-SMALL-2SIDE]  148.56,87.18 0 top
R1  150  [0603-RES]  31.87,14.04 0 top
R2  150  [0603-RES]  26.1,14.07 0 top
R3  150  [0603-RES]  20.61,14.06 0 top
R4  150  [0603-RES]  14.91,14.06 0 top
R5  150  [0603-RES]  9.37,14.21 0 top
R6  150  [0603-RES]  31.87,29.28 0 top
R7  150  [0603-RES]  26.1,29.31 0 top
R8  150  [0603-RES]  20.61,29.3 0 top
R9  150  [0603-RES]  14.91,29.3 0 top
R10  150  [0603-RES]  9.37,29.45 0 top
R11  150  [0603-RES]  31.87,44.52 0 top
R12  150  [0603-RES]  26.1,44.55 0 top
R13  150  [0603-RES]  20.61,44.54 0 top
R14  150  [0603-RES]  14.91,44.54 0 top
R15  150  [0603-RES]  9.37,44.69 0 top
R16  150  [0603-RES]  31.87,59.76 0 top
R17  150  [0603-RES]  26.1,59.79 0 top
R18  150  [0603-RES]  20.61,59.78 0 top
R19  150  [0603-RES]  14.91,59.78 0 top
R20  150  [0603-RES]  9.37,59.93 0 top
R21  150  [0603-RES]  31.87,75 0 top
R22  150  [0603-RES]  26.1,75.03 0 top
R23  150  [0603-RES]  20.61,75.02 0 top
R24  150  [0603-RES]  14.91,75.02 0 top
R25  150  [0603-RES]  9.37,75.17 0 top
R26  150  [0603-RES]  31.87,90.24 0 top
R27  150  [0603-RES]  26.1,90.27 0 top
R28  150  [0603-RES]  20.61,90.26 0 top
R29  150  [0603-RES]  14.91,90.26 0 top
R30  150  [0603-RES]  9.37,90.41 0 top
R31  150  [0603-RES]  66.67,14.04 0 top
R32  150  [0603-RES]  60.89,14.07 0 top
R33  150  [0603-RES]  55.41,14.06 0 top
R34  150  [0603-RES]  49.71,14.06 0 top
R35  150  [0603-RES]  44.17,14.21 0 top
R36  150  [0603-RES]  66.67,29.28 0 top
R37  150  [0603-RES]  60.89,29.31 0 top
R38  150  [0603-RES]  55.41,29.3 0 top
R39  150  [0603-RES]  49.71,29.3 0 top
R40  150  [0603-RES]  44.17,29.45 0 top
R41  150  [0603-RES]  66.67,44.52 0 top
R42  150  [0603-RES]  60.89,44.55 0 top
R43  150  [0603-RES]  55.41,44.54 0 top
R44  150  [0603-RES]  49.71,44.54 0 top
R45  150  [0603-RES]  44.17,44.69 0 top
R46  150  [0603-RES]  66.67,59.76 0 top
R47  150  [0603-RES]  60.89,59.79 0 top
R48  150  [0603-RES]  55.41,59.78 0 top
R49  150  [0603-RES]  49.71,59.78 0 top
R50  150  [0603-RES]  44.17,59.93 0 top
R51  150  [0603-RES]  66.67,75 0 top
R52  150  [0603-RES]  60.89,75.03 0 top
R53  150  [0603-RES]  55.41,75.02 0 top
R54  150  [0603-RES]  49.71,75.02 0 top
R55  150  [0603-RES]  44.17,75.17 0 top
R56  150  [0603-RES]  66.67,90.24 0 top
R57  150  [0603-RES]  60.89,90.27 0 top
R58  150  [0603-RES]  55.41,90.26 0 top
R59  150  [0603-RES]  49.71,90.26 0 top
R60  150  [0603-RES]  44.17,90.41 0 top
R61  150  [0603-RES]  101.47,14.04 0 top
R62  150  [0603-RES]  95.69,14.07 0 top
R63  150  [0603-RES]  90.21,14.06 0 top
R64  150  [0603-RES]  84.51,14.06 0 top
R65  150  [0603-RES]  78.96,14.21 0 top
R66  150  [0603-RES]  101.47,29.28 0 top
R67  150  [0603-RES]  95.69,29.31 0 top
R68  150  [0603-RES]  90.21,29.3 0 top
R69  150  [0603-RES]  84.51,29.3 0 top
R70  150  [0603-RES]  78.96,29.45 0 top
R71  150  [0603-RES]  101.47,44.52 0 top
R72  150  [0603-RES]  95.69,44.55 0 top
R73  150  [0603-RES]  90.21,44.54 0 top
R74  150  [0603-RES]  84.51,44.54 0 top
R75  150  [0603-RES]  78.96,44.69 0 top
R76  150  [0603-RES]  101.47,59.76 0 top
R77  150  [0603-RES]  95.69,59.79 0 top
R78  150  [0603-RES]  90.21,59.78 0 top
R79  150  [0603-RES]  84.51,59.78 0 top
R80  150  [0603-RES]  78.96,59.93 0 top
R81  150  [0603-RES]  101.47,75 0 top
R82  150  [0603-RES]  95.69,75.03 0 top
R83  150  [0603-RES]  90.21,75.02 0 top
R84  150  [0603-RES]  84.51,75.02 0 top
R85  150  [0603-RES]  78.96,75.17 0 top
R86  150  [0603-RES]  101.47,90.24 0 top
R87  150  [0603-RES]  95.69,90.27 0 top
R88  150  [0603-RES]  90.21,90.26 0 top
R89  150  [0603-RES]  84.51,90.26 0 top
R90  150  [0603-RES]  78.96,90.41 0 top
R91  150  [0603-RES]  136.26,14.04 0 top
R92  150  [0603-RES]  130.49,14.07 0 top
R93  150  [0603-RES]  125.01,14.06 0 top
R94  150  [0603-RES]  119.31,14.06 0 top
R95  150  [0603-RES]  113.76,14.21 0 top
R96  150  [0603-RES]  136.26,29.28 0 top
R97  150  [0603-RES]  130.49,29.31 0 top
R98  150  [0603-RES]  125.01,29.3 0 top
R99  150  [0603-RES]  119.31,29.3 0 top
R100  150  [0603-RES]  113.76,29.45 0 top
R101  150  [0603-RES]  136.26,44.52 0 top
R102  150  [0603-RES]  130.49,44.55 0 top
R103  150  [0603-RES]  125.01,44.54 0 top
R104  150  [0603-RES]  119.31,44.54 0 top
R105  150  [0603-RES]  113.76,44.69 0 top
R106  150  [0603-RES]  136.26,59.76 0 top
R107  150  [0603-RES]  130.49,59.79 0 top
R108  150  [0603-RES]  125.01,59.78 0 top
R109  150  [0603-RES]  119.31,59.78 0 top
R110  150  [0603-RES]  113.76,59.93 0 top
R111  150  [0603-RES]  136.26,75 0 top
R112  150  [0603-RES]  130.49,75.03 0 top
R113  150  [0603-RES]  125.01,75.02 0 top
R114  150  [0603-RES]  119.31,75.02 0 top
R115  150  [0603-RES]  113.76,75.17 0 top
R116  150  [0603-RES]  136.26,90.24 0 top
R117  150  [0603-RES]  130.49,90.27 0 top
R118  150  [0603-RES]  125.01,90.26 0 top
R119  150  [0603-RES]  119.31,90.26 0 top
R120  150  [0603-RES]  113.76,90.41 0 top
R121  150  [0603-RES]  171.06,14.04 0 top
R122  150  [0603-RES]  165.29,14.07 0 top
R123  150  [0603-RES]  159.81,14.06 0 top
R124  150  [0603-RES]  154.11,14.06 0 top
R125  150  [0603-RES]  148.56,14.21 0 top
R126  150  [0603-RES]  171.06,29.28 0 top
R127  150  [0603-RES]  165.29,29.31 0 top
R128  150  [0603-RES]  159.81,29.3 0 top
R129  150  [0603-RES]  154.11,29.3 0 top
R130  150  [0603-RES]  148.56,29.45 0 top
R131  150  [0603-RES]  171.06,44.52 0 top
R132  150  [0603-RES]  165.29,44.55 0 top
R133  150  [0603-RES]  159.81,44.54 0 top
R134  150  [0603-RES]  154.11,44.54 0 top
R135  150  [0603-RES]  148.56,44.69 0 top
R136  150  [0603-RES]  171.06,59.76 0 top
R137  150  [0603-RES]  165.29,59.79 0 top
R138  150  [0603-RES]  159.81,59.78 0 top
R139  150  [0603-RES]  154.11,59.78 0 top
R140  150  [0603-RES]  148.56,59.93 0 top
R141  150  [0603-RES]  171.06,75 0 top
R142  150  [0603-RES]  165.29,75.03 0 top
R143  150  [0603-RES]  159.81,75.02 0 top
R144  150  [0603-RES]  154.11,75.02 0 top
R145  150  [0603-RES]  148.56,75.17 0 top
R146  150  [0603-RES]  171.06,90.24 0 top
R147  150  [0603-RES]  165.29,90.27 0 top
R148  150  [0603-RES]  159.81,90.26 0 top
R149  150  [0603-RES]  154.11,90.26 0 top
R150  150  [0603-RES]  148.56,90.41 0 top
U$1  [LOGO-L]  31.84,15.38 0 bottom
U$2  [LOGO-L]  26.11,15.34 0 bottom
U$3  [LOGO-L]  20.48,15.34 0 bottom
U$4  [LOGO-L]  14.93,15.36 0 bottom
U$5  [LOGO-L]  9.34,15.34 0 bottom
U$6  [LOGO-L]  31.84,30.62 0 bottom
U$7  [LOGO-L]  26.11,30.58 0 bottom
U$8  [LOGO-L]  20.48,30.58 0 bottom
U$9  [LOGO-L]  14.93,30.6 0 bottom
U$10  [LOGO-L]  9.34,30.58 0 bottom
U$11  [LOGO-L]  31.84,45.86 0 bottom
U$12  [LOGO-L]  26.11,45.82 0 bottom
U$13  [LOGO-L]  20.48,45.82 0 bottom
U$14  [LOGO-L]  14.93,45.84 0 bottom
U$15  [LOGO-L]  9.34,45.82 0 bottom
U$16  [LOGO-L]  31.84,61.1 0 bottom
U$17  [LOGO-L]  26.11,61.06 0 bottom
U$18  [LOGO-L]  20.48,61.06 0 bottom
U$19  [LOGO-L]  14.93,61.08 0 bottom
U$20  [LOGO-L]  9.34,61.06 0 bottom
U$21  [LOGO-L]  31.84,76.34 0 bottom
U$22  [LOGO-L]  26.11,76.3 0 bottom
U$23  [LOGO-L]  20.48,76.3 0 bottom
U$24  [LOGO-L]  14.93,76.32 0 bottom
U$25  [LOGO-L]  9.34,76.3 0 bottom
U$26  [LOGO-L]  31.84,91.58 0 bottom
U$27  [LOGO-L]  26.11,91.54 0 bottom
U$28  [LOGO-L]  20.48,91.54 0 bottom
U$29  [LOGO-L]  14.93,91.56 0 bottom
U$30  [LOGO-L]  9.34,91.54 0 bottom
U$31  [LOGO-L]  66.63,15.38 0 bottom
U$32  [LOGO-L]  60.91,15.34 0 bottom
U$33  [LOGO-L]  55.28,15.34 0 bottom
U$34  [LOGO-L]  49.72,15.36 0 bottom
U$35  [LOGO-L]  44.14,15.34 0 bottom
U$36  [LOGO-L]  66.63,30.62 0 bottom
U$37  [LOGO-L]  60.91,30.58 0 bottom
U$38  [LOGO-L]  55.28,30.58 0 bottom
U$39  [LOGO-L]  49.72,30.6 0 bottom
U$40  [LOGO-L]  44.14,30.58 0 bottom
U$41  [LOGO-L]  66.63,45.86 0 bottom
U$42  [LOGO-L]  60.91,45.82 0 bottom
U$43  [LOGO-L]  55.28,45.82 0 bottom
U$44  [LOGO-L]  49.72,45.84 0 bottom
U$45  [LOGO-L]  44.14,45.82 0 bottom
U$46  [LOGO-L]  66.63,61.1 0 bottom
U$47  [LOGO-L]  60.91,61.06 0 bottom
U$48  [LOGO-L]  55.28,61.06 0 bottom
U$49  [LOGO-L]  49.72,61.08 0 bottom
U$50  [LOGO-L]  44.14,61.06 0 bottom
U$51  [LOGO-L]  66.63,76.34 0 bottom
U$52  [LOGO-L]  60.91,76.3 0 bottom
U$53  [LOGO-L]  55.28,76.3 0 bottom
U$54  [LOGO-L]  49.72,76.32 0 bottom
U$55  [LOGO-L]  44.14,76.3 0 bottom
U$56  [LOGO-L]  66.63,91.58 0 bottom
U$57  [LOGO-L]  60.91,91.54 0 bottom
U$58  [LOGO-L]  55.28,91.54 0 bottom
U$59  [LOGO-L]  49.72,91.56 0 bottom
U$60  [LOGO-L]  44.14,91.54 0 bottom
U$61  [LOGO-L]  101.43,15.38 0 bottom
U$62  [LOGO-L]  95.71,15.34 0 bottom
U$63  [LOGO-L]  90.08,15.34 0 bottom
U$64  [LOGO-L]  84.52,15.36 0 bottom
U$65  [LOGO-L]  78.94,15.34 0 bottom
U$66  [LOGO-L]  101.43,30.62 0 bottom
U$67  [LOGO-L]  95.71,30.58 0 bottom
U$68  [LOGO-L]  90.08,30.58 0 bottom
U$69  [LOGO-L]  84.52,30.6 0 bottom
U$70  [LOGO-L]  78.94,30.58 0 bottom
U$71  [LOGO-L]  101.43,45.86 0 bottom
U$72  [LOGO-L]  95.71,45.82 0 bottom
U$73  [LOGO-L]  90.08,45.82 0 bottom
U$74  [LOGO-L]  84.52,45.84 0 bottom
U$75  [LOGO-L]  78.94,45.82 0 bottom
U$76  [LOGO-L]  101.43,61.1 0 bottom
U$77  [LOGO-L]  95.71,61.06 0 bottom
U$78  [LOGO-L]  90.08,61.06 0 bottom
U$79  [LOGO-L]  84.52,61.08 0 bottom
U$80  [LOGO-L]  78.94,61.06 0 bottom
U$81  [LOGO-L]  101.43,76.34 0 bottom
U$82  [LOGO-L]  95.71,76.3 0 bottom
U$83  [LOGO-L]  90.08,76.3 0 bottom
U$84  [LOGO-L]  84.52,76.32 0 bottom
U$85  [LOGO-L]  78.94,76.3 0 bottom
U$86  [LOGO-L]  101.43,91.58 0 bottom
U$87  [LOGO-L]  95.71,91.54 0 bottom
U$88  [LOGO-L]  90.08,91.54 0 bottom
U$89  [LOGO-L]  84.52,91.56 0 bottom
U$90  [LOGO-L]  78.94,91.54 0 bottom
U$91  [LOGO-L]  136.23,15.38 0 bottom
U$92  [LOGO-L]  130.51,15.34 0 bottom
U$93  [LOGO-L]  124.87,15.34 0 bottom
U$94  [LOGO-L]  119.32,15.36 0 bottom
U$95  [LOGO-L]  113.74,15.34 0 bottom
U$96  [LOGO-L]  136.23,30.62 0 bottom
U$97  [LOGO-L]  130.51,30.58 0 bottom
U$98  [LOGO-L]  124.87,30.58 0 bottom
U$99  [LOGO-L]  119.32,30.6 0 bottom
U$100  [LOGO-L]  113.74,30.58 0 bottom
U$101  [LOGO-L]  136.23,45.86 0 bottom
U$102  [LOGO-L]  130.51,45.82 0 bottom
U$103  [LOGO-L]  124.87,45.82 0 bottom
U$104  [LOGO-L]  119.32,45.84 0 bottom
U$105  [LOGO-L]  113.74,45.82 0 bottom
U$106  [LOGO-L]  136.23,61.1 0 bottom
U$107  [LOGO-L]  130.51,61.06 0 bottom
U$108  [LOGO-L]  124.87,61.06 0 bottom
U$109  [LOGO-L]  119.32,61.08 0 bottom
U$110  [LOGO-L]  113.74,61.06 0 bottom
U$111  [LOGO-L]  136.23,76.34 0 bottom
U$112  [LOGO-L]  130.51,76.3 0 bottom
U$113  [LOGO-L]  124.87,76.3 0 bottom
U$114  [LOGO-L]  119.32,76.32 0 bottom
U$115  [LOGO-L]  113.74,76.3 0 bottom
U$116  [LOGO-L]  136.23,91.58 0 bottom
U$117  [LOGO-L]  130.51,91.54 0 bottom
U$118  [LOGO-L]  124.87,91.54 0 bottom
U$119  [LOGO-L]  119.32,91.56 0 bottom
U$120  [LOGO-L]  113.74,91.54 0 bottom
U$121  [LOGO-L]  171.03,15.38 0 bottom
U$122  [LOGO-L]  165.3,15.34 0 bottom
U$123  [LOGO-L]  159.67,15.34 0 bottom
U$124  [LOGO-L]  154.12,15.36 0 bottom
U$125  [LOGO-L]  148.53,15.34 0 bottom
U$126  [LOGO-L]  171.03,30.62 0 bottom
U$127  [LOGO-L]  165.3,30.58 0 bottom
U$128  [LOGO-L]  159.67,30.58 0 bottom
U$129  [LOGO-L]  154.12,30.6 0 bottom
U$130  [LOGO-L]  148.53,30.58 0 bottom
U$131  [LOGO-L]  171.03,45.86 0 bottom
U$132  [LOGO-L]  165.3,45.82 0 bottom
U$133  [LOGO-L]  159.67,45.82 0 bottom
U$134  [LOGO-L]  154.12,45.84 0 bottom
U$135  [LOGO-L]  148.53,45.82 0 bottom
U$136  [LOGO-L]  171.03,61.1 0 bottom
U$137  [LOGO-L]  165.3,61.06 0 bottom
U$138  [LOGO-L]  159.67,61.06 0 bottom
U$139  [LOGO-L]  154.12,61.08 0 bottom
U$140  [LOGO-L]  148.53,61.06 0 bottom
U$141  [LOGO-L]  171.03,76.34 0 bottom
U$142  [LOGO-L]  165.3,76.3 0 bottom
U$143  [LOGO-L]  159.67,76.3 0 bottom
U$144  [LOGO-L]  154.12,76.32 0 bottom
U$145  [LOGO-L]  148.53,76.3 0 bottom
U$146  [LOGO-L]  171.03,91.58 0 bottom
U$147  [LOGO-L]  165.3,91.54 0 bottom
U$148  [LOGO-L]  159.67,91.54 0 bottom
U$149  [LOGO-L]  154.12,91.56 0 bottom
U$150  [LOGO-L]  148.53,91.54 0 bottom

## Library data of the parts
D1-D150 = SparkFun-LED; PROD_ID: DIO-09955
E$1 = SparkFun-Retired
E$15 E$16 = SparkFun-Aesthetics
LED+1-LED+150 LED-1-LED-150 U$1-U$150 = LilyPad-Wearables
R1-R150 = SparkFun-Resistors; PROD-ID: 13326

## Nets
1: D1.A LED+1.1
2: D1.C R1.2
3: LED-1.1 R1.1
4: D2.A LED+2.1
5: D2.C R2.2
6: LED-2.1 R2.1
7: D3.A LED+3.1
8: D3.C R3.2
9: LED-3.1 R3.1
10: D4.A LED+4.1
11: D4.C R4.2
12: LED-4.1 R4.1
13: D5.A LED+5.1
14: D5.C R5.2
15: LED-5.1 R5.1
16: LED-6.1 R6.1
17: D6.A LED+6.1
18: D6.C R6.2
19: D7.A LED+7.1
20: D7.C R7.2
21: LED-7.1 R7.1
22: D8.A LED+8.1
23: D8.C R8.2
24: LED-8.1 R8.1
25: LED-9.1 R9.1
26: D9.C R9.2
27: D9.A LED+9.1
28: D10.A LED+10.1
29: D10.C R10.2
30: LED-10.1 R10.1
31: LED-11.1 R11.1
32: D11.A LED+11.1
33: D11.C R11.2
34: D12.A LED+12.1
35: D12.C R12.2
36: LED-12.1 R12.1
37: D13.A LED+13.1
38: D13.C R13.2
39: LED-13.1 R13.1
40: LED-14.1 R14.1
41: D14.C R14.2
42: D14.A LED+14.1
43: D15.A LED+15.1
44: D15.C R15.2
45: LED-15.1 R15.1
46: LED-16.1 R16.1
47: D16.A LED+16.1
48: D16.C R16.2
49: D17.A LED+17.1
50: D17.C R17.2
51: LED-17.1 R17.1
52: D18.A LED+18.1
53: D18.C R18.2
54: LED-18.1 R18.1
55: LED-19.1 R19.1
56: D19.C R19.2
57: D19.A LED+19.1
58: D20.A LED+20.1
59: D20.C R20.2
60: LED-20.1 R20.1
61: LED-21.1 R21.1
62: D21.A LED+21.1
63: D21.C R21.2
64: D22.A LED+22.1
65: D22.C R22.2
66: LED-22.1 R22.1
67: D23.A LED+23.1
68: D23.C R23.2
69: LED-23.1 R23.1
70: LED-24.1 R24.1
71: D24.C R24.2
72: D24.A LED+24.1
73: D25.A LED+25.1
74: D25.C R25.2
75: LED-25.1 R25.1
76: LED-26.1 R26.1
77: D26.A LED+26.1
78: D26.C R26.2
79: D27.A LED+27.1
80: D27.C R27.2
81: LED-27.1 R27.1
82: D28.A LED+28.1
83: D28.C R28.2
84: LED-28.1 R28.1
85: LED-29.1 R29.1
86: D29.C R29.2
87: D29.A LED+29.1
88: D30.A LED+30.1
89: D30.C R30.2
90: LED-30.1 R30.1
91: LED-31.1 R31.1
92: D31.A LED+31.1
93: D31.C R31.2
94: D32.A LED+32.1
95: D32.C R32.2
96: LED-32.1 R32.1
97: D33.A LED+33.1
98: D33.C R33.2
99: LED-33.1 R33.1
100: LED-34.1 R34.1
101: D34.C R34.2
102: D34.A LED+34.1
103: D35.A LED+35.1
104: D35.C R35.2
105: LED-35.1 R35.1
106: LED-36.1 R36.1
107: D36.A LED+36.1
108: D36.C R36.2
109: D37.A LED+37.1
110: D37.C R37.2
111: LED-37.1 R37.1
112: D38.A LED+38.1
113: D38.C R38.2
114: LED-38.1 R38.1
115: LED-39.1 R39.1
116: D39.C R39.2
117: D39.A LED+39.1
118: D40.A LED+40.1
119: D40.C R40.2
120: LED-40.1 R40.1
121: LED-41.1 R41.1
122: D41.A LED+41.1
123: D41.C R41.2
124: D42.A LED+42.1
125: D42.C R42.2
126: LED-42.1 R42.1
127: D43.A LED+43.1
128: D43.C R43.2
129: LED-43.1 R43.1
130: LED-44.1 R44.1
131: D44.C R44.2
132: D44.A LED+44.1
133: D45.A LED+45.1
134: D45.C R45.2
135: LED-45.1 R45.1
136: LED-46.1 R46.1
137: D46.A LED+46.1
138: D46.C R46.2
139: D47.A LED+47.1
140: D47.C R47.2
141: LED-47.1 R47.1
142: D48.A LED+48.1
143: D48.C R48.2
144: LED-48.1 R48.1
145: LED-49.1 R49.1
146: D49.C R49.2
147: D49.A LED+49.1
148: D50.A LED+50.1
149: D50.C R50.2
150: LED-50.1 R50.1
151: LED-51.1 R51.1
152: D51.A LED+51.1
153: D51.C R51.2
154: D52.A LED+52.1
155: D52.C R52.2
156: LED-52.1 R52.1
157: D53.A LED+53.1
158: D53.C R53.2
159: LED-53.1 R53.1
160: LED-54.1 R54.1
161: D54.C R54.2
162: D54.A LED+54.1
163: D55.A LED+55.1
164: D55.C R55.2
165: LED-55.1 R55.1
166: LED-56.1 R56.1
167: D56.A LED+56.1
168: D56.C R56.2
169: D57.A LED+57.1
170: D57.C R57.2
171: LED-57.1 R57.1
172: D58.A LED+58.1
173: D58.C R58.2
174: LED-58.1 R58.1
175: LED-59.1 R59.1
176: D59.C R59.2
177: D59.A LED+59.1
178: D60.A LED+60.1
179: D60.C R60.2
180: LED-60.1 R60.1
181: LED-61.1 R61.1
182: D61.A LED+61.1
183: D61.C R61.2
184: D62.A LED+62.1
185: D62.C R62.2
186: LED-62.1 R62.1
187: D63.A LED+63.1
188: D63.C R63.2
189: LED-63.1 R63.1
190: LED-64.1 R64.1
191: D64.C R64.2
192: D64.A LED+64.1
193: D65.A LED+65.1
194: D65.C R65.2
195: LED-65.1 R65.1
196: LED-66.1 R66.1
197: D66.A LED+66.1
198: D66.C R66.2
199: D67.A LED+67.1
200: D67.C R67.2
201: LED-67.1 R67.1
202: D68.A LED+68.1
203: D68.C R68.2
204: LED-68.1 R68.1
205: LED-69.1 R69.1
206: D69.C R69.2
207: D69.A LED+69.1
208: D70.A LED+70.1
209: D70.C R70.2
210: LED-70.1 R70.1
211: LED-71.1 R71.1
212: D71.A LED+71.1
213: D71.C R71.2
214: D72.A LED+72.1
215: D72.C R72.2
216: LED-72.1 R72.1
217: D73.A LED+73.1
218: D73.C R73.2
219: LED-73.1 R73.1
220: LED-74.1 R74.1
221: D74.C R74.2
222: D74.A LED+74.1
223: D75.A LED+75.1
224: D75.C R75.2
225: LED-75.1 R75.1
226: LED-76.1 R76.1
227: D76.A LED+76.1
228: D76.C R76.2
229: D77.A LED+77.1
230: D77.C R77.2
231: LED-77.1 R77.1
232: D78.A LED+78.1
233: D78.C R78.2
234: LED-78.1 R78.1
235: LED-79.1 R79.1
236: D79.C R79.2
237: D79.A LED+79.1
238: D80.A LED+80.1
239: D80.C R80.2
240: LED-80.1 R80.1
241: LED-81.1 R81.1
242: D81.A LED+81.1
243: D81.C R81.2
244: D82.A LED+82.1
245: D82.C R82.2
246: LED-82.1 R82.1
247: D83.A LED+83.1
248: D83.C R83.2
249: LED-83.1 R83.1
250: LED-84.1 R84.1
251: D84.C R84.2
252: D84.A LED+84.1
253: D85.A LED+85.1
254: D85.C R85.2
255: LED-85.1 R85.1
256: LED-86.1 R86.1
257: D86.A LED+86.1
258: D86.C R86.2
259: D87.A LED+87.1
260: D87.C R87.2
261: LED-87.1 R87.1
262: D88.A LED+88.1
263: D88.C R88.2
264: LED-88.1 R88.1
265: LED-89.1 R89.1
266: D89.C R89.2
267: D89.A LED+89.1
268: D90.A LED+90.1
269: D90.C R90.2
270: LED-90.1 R90.1
271: LED-91.1 R91.1
272: D91.A LED+91.1
273: D91.C R91.2
274: D92.A LED+92.1
275: D92.C R92.2
276: LED-92.1 R92.1
277: D93.A LED+93.1
278: D93.C R93.2
279: LED-93.1 R93.1
280: LED-94.1 R94.1
281: D94.C R94.2
282: D94.A LED+94.1
283: D95.A LED+95.1
284: D95.C R95.2
285: LED-95.1 R95.1
286: LED-96.1 R96.1
287: D96.A LED+96.1
288: D96.C R96.2
289: D97.A LED+97.1
290: D97.C R97.2
291: LED-97.1 R97.1
292: D98.A LED+98.1
293: D98.C R98.2
294: LED-98.1 R98.1
295: LED-99.1 R99.1
296: D99.C R99.2
297: D99.A LED+99.1
298: D100.A LED+100.1
299: D100.C R100.2
300: LED-100.1 R100.1
301: LED-101.1 R101.1
302: D101.A LED+101.1
303: D101.C R101.2
304: D102.A LED+102.1
305: D102.C R102.2
306: LED-102.1 R102.1
307: D103.A LED+103.1
308: D103.C R103.2
309: LED-103.1 R103.1
310: LED-104.1 R104.1
311: D104.C R104.2
312: D104.A LED+104.1
313: D105.A LED+105.1
314: D105.C R105.2
315: LED-105.1 R105.1
316: LED-106.1 R106.1
317: D106.A LED+106.1
318: D106.C R106.2
319: D107.A LED+107.1
320: D107.C R107.2
321: LED-107.1 R107.1
322: D108.A LED+108.1
323: D108.C R108.2
324: LED-108.1 R108.1
325: LED-109.1 R109.1
326: D109.C R109.2
327: D109.A LED+109.1
328: D110.A LED+110.1
329: D110.C R110.2
330: LED-110.1 R110.1
331: LED-111.1 R111.1
332: D111.A LED+111.1
333: D111.C R111.2
334: D112.A LED+112.1
335: D112.C R112.2
336: LED-112.1 R112.1
337: D113.A LED+113.1
338: D113.C R113.2
339: LED-113.1 R113.1
340: LED-114.1 R114.1
341: D114.C R114.2
342: D114.A LED+114.1
343: D115.A LED+115.1
344: D115.C R115.2
345: LED-115.1 R115.1
346: LED-116.1 R116.1
347: D116.A LED+116.1
348: D116.C R116.2
349: D117.A LED+117.1
350: D117.C R117.2
351: LED-117.1 R117.1
352: D118.A LED+118.1
353: D118.C R118.2
354: LED-118.1 R118.1
355: LED-119.1 R119.1
356: D119.C R119.2
357: D119.A LED+119.1
358: D120.A LED+120.1
359: D120.C R120.2
360: LED-120.1 R120.1
361: LED-121.1 R121.1
362: D121.A LED+121.1
363: D121.C R121.2
364: D122.A LED+122.1
365: D122.C R122.2
366: LED-122.1 R122.1
367: D123.A LED+123.1
368: D123.C R123.2
369: LED-123.1 R123.1
370: LED-124.1 R124.1
371: D124.C R124.2
372: D124.A LED+124.1
373: D125.A LED+125.1
374: D125.C R125.2
375: LED-125.1 R125.1
376: LED-126.1 R126.1
377: D126.A LED+126.1
378: D126.C R126.2
379: D127.A LED+127.1
380: D127.C R127.2
381: LED-127.1 R127.1
382: D128.A LED+128.1
383: D128.C R128.2
384: LED-128.1 R128.1
385: LED-129.1 R129.1
386: D129.C R129.2
387: D129.A LED+129.1
388: D130.A LED+130.1
389: D130.C R130.2
390: LED-130.1 R130.1
391: LED-131.1 R131.1
392: D131.A LED+131.1
393: D131.C R131.2
394: D132.A LED+132.1
395: D132.C R132.2
396: LED-132.1 R132.1
397: D133.A LED+133.1
398: D133.C R133.2
399: LED-133.1 R133.1
400: LED-134.1 R134.1
401: D134.C R134.2
402: D134.A LED+134.1
403: D135.A LED+135.1
404: D135.C R135.2
405: LED-135.1 R135.1
406: LED-136.1 R136.1
407: D136.A LED+136.1
408: D136.C R136.2
409: D137.A LED+137.1
410: D137.C R137.2
411: LED-137.1 R137.1
412: D138.A LED+138.1
413: D138.C R138.2
414: LED-138.1 R138.1
415: LED-139.1 R139.1
416: D139.C R139.2
417: D139.A LED+139.1
418: D140.A LED+140.1
419: D140.C R140.2
420: LED-140.1 R140.1
421: LED-141.1 R141.1
422: D141.A LED+141.1
423: D141.C R141.2
424: D142.A LED+142.1
425: D142.C R142.2
426: LED-142.1 R142.1
427: D143.A LED+143.1
428: D143.C R143.2
429: LED-143.1 R143.1
430: LED-144.1 R144.1
431: D144.C R144.2
432: D144.A LED+144.1
433: D145.A LED+145.1
434: D145.C R145.2
435: LED-145.1 R145.1
436: LED-146.1 R146.1
437: D146.A LED+146.1
438: D146.C R146.2
439: D147.A LED+147.1
440: D147.C R147.2
441: LED-147.1 R147.1
442: D148.A LED+148.1
443: D148.C R148.2
444: LED-148.1 R148.1
445: LED-149.1 R149.1
446: D149.C R149.2
447: D149.A LED+149.1
448: D150.A LED+150.1
449: D150.C R150.2
450: LED-150.1 R150.1